# EAGLE board PDF_project_shield_final_version_v1 (EAGLE 8.7.0)
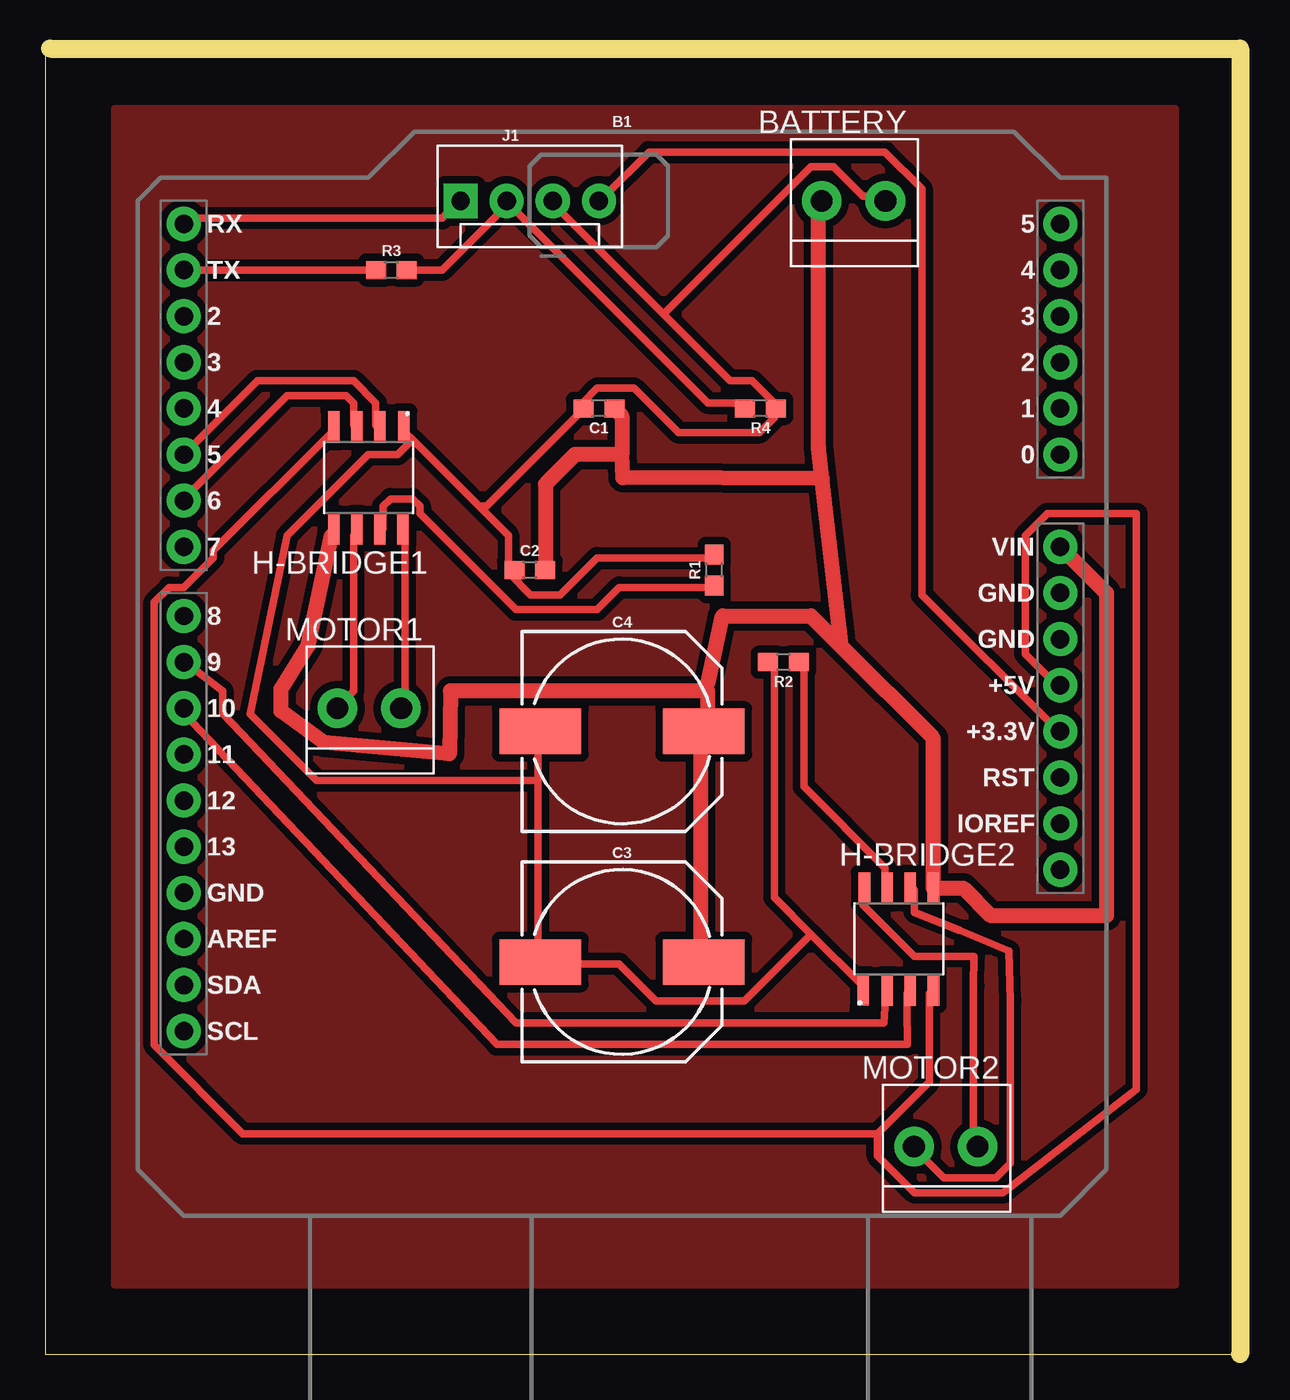
[diagram p0: board, top side]

Size 66.02 x 72.06 mm. Coordinates in mm from the lower left corner, seen from the top.
Outline: 0,0 66.02,0 66.02,72.06 0,72.06 0,0
Copper layers (1*16): Top 0.035mm / dielectric 1.5mm / Bottom 0.035mm
Design rules "default *": minimum track width 16mil, minimum drill 0.35mm, track to track 16mil, track to pad 16mil, pad to pad 16mil, via to via 16mil, smd to smd 16mil, copper to edge 40mil, drill to drill 6mil, minimum pad ring 10mil, minimum via ring 8mil, stop-mask expansion 4mil, vias tented up to drill 0mil, thermal gap 20mil
Milling: 2 lines

## Footprints (pad centres in the part's own frame; a part is rotated, then mirrored left to right if it is on the bottom)
UNO_R3_SHIELD = drill 1.016 pad 1.88: 3.3V 24.13,-2.54; 5V 24.13,0; A0 24.13,12.7; A1 24.13,15.24; A2 24.13,17.78; A3 24.13,20.32; A4 24.13,22.86; A5 24.13,25.4; AREF -24.13,-13.97; D2 -24.13,20.32; D3 -24.13,17.78; D4 -24.13,15.24; D5 -24.13,12.7; D6 -24.13,10.16; D7 -24.13,7.62; D8 -24.13,3.81; D9 -24.13,1.27; D10 -24.13,-1.27; D11 -24.13,-3.81; D12 -24.13,-6.35; D13 -24.13,-8.89; GND@0 24.13,2.54; GND@1 24.13,5.08; GND@2 -24.13,-11.43; IOREF 24.13,-7.62; NC 24.13,-10.16; RES 24.13,-5.08; RX -24.13,25.4; SCL -24.13,-19.05; SDA -24.13,-16.51; TX -24.13,22.86; VIN 24.13,7.62
ED555DS-2DS = drill 1.2 pad 2.184: 1 1.8,0; 2 -1.7,0
0603 = smd 1.1 x 1: 1 -0.85,0; 2 0.85,0
NIC_10X10.5_CAP = smd 4.5 x 2.5: + 4.5,0; - -4.5,0
H-BRIDGE_PACKAGE = smd 0.65 x 1.75: 1 -1.96,-2.79; 2 -0.64,-2.8; 3 0.63,-2.8; 4 1.9,-2.8; 5 1.9,2.8; 6 0.63,2.8; 7 -0.64,2.8; 8 -1.9,2.8
MOLEX-1X4 = drill 1.016 pad 1.88 square: 1 0,0 | drill 1.016 pad 1.88: 2 2.54,0; 3 5.08,0; 4 7.62,0

## Placement (x,y rotation side)
B1  ARDUINO_UNO_R3_SHIELDBASIC  [UNO_R3_SHIELD]  31.75,36.83 0 top
BATTERY  TERM-1X02-FABLAB  [ED555DS-2DS]  44.45,63.5 0 top
C1  0.22uF  [0603]  30.48,52.07 180 top
C2  0.22uF  [0603]  26.67,43.18 0 top
C3  100uF  [NIC_10X10.5_CAP]  31.75,21.59 0 top
C4  100uF  [NIC_10X10.5_CAP]  31.75,34.29 0 top
H-BRIDGE1  [H-BRIDGE_PACKAGE]  17.78,48.26 180 top
H-BRIDGE2  [H-BRIDGE_PACKAGE]  46.99,22.86 0 top
J1  [MOLEX-1X4]  22.86,63.5 0 top
MOTOR1  TERM-1X02-FABLAB  [ED555DS-2DS]  17.78,35.56 0 top
MOTOR2  TERM-1X02-FABLAB  [ED555DS-2DS]  49.53,11.43 0 top
R1  0.27  [0603]  36.83,43.18 90 top
R2  0.27  [0603]  40.64,38.1 180 top
R3  1k  [0603]  19.05,59.69 0 top
R4  2.0k  [0603]  39.37,52.07 180 top

## Library data of the parts
B1 = SparkFun-Boards
BATTERY MOTOR1 MOTOR2 = fab
C1 C2 = SparkFun-Capacitors; PROD_ID: CAP-07822
C3 C4 = SparkFun-Capacitors; PROD_ID: CAP-08362
H-BRIDGE1 H-BRIDGE2 = my_library
J1 = SparkFun-Connectors; PROD_ID: CONN-08186; SF_ID: PRT-08231
R1 R2 = SparkFun-Resistors; PROD_ID: RES-08787
R3 = SparkFun-Resistors; PROD_ID: RES-07856
R4 = SparkFun-Resistors; PROD_ID: RES-08296

## Nets
GND: BATTERY.1 C1.2 C2.1 C3.- C4.- H-BRIDGE1.1 H-BRIDGE2.1 J1.3 R1.2 R2.2 R4.1
N$1: B1.VIN BATTERY.2 C1.1 C2.2 C3.+ C4.+ H-BRIDGE1.5 H-BRIDGE2.5
N$2: B1.5V H-BRIDGE1.4 H-BRIDGE2.4
N$3: H-BRIDGE1.8 MOTOR1.1
N$4: H-BRIDGE1.6 MOTOR1.2
N$5: H-BRIDGE2.8 MOTOR2.1
N$6: H-BRIDGE2.6 MOTOR2.2
N$8: B1.D10 H-BRIDGE2.3
N$9: B1.D9 H-BRIDGE2.2
N$10: B1.D5 H-BRIDGE1.2
N$11: B1.D6 H-BRIDGE1.3
N$12: H-BRIDGE1.7 R1.1
N$13: H-BRIDGE2.7 R2.1
N$14: B1.TX R3.1
N$15: B1.RX J1.1
N$16: B1.3.3V J1.4
N$17: J1.2 R3.2 R4.2

## Tracks (layer width: path | path; a pad name or v marks a point on that pad's centre or on a via)
GND
  Top 0.406: 27.13,31.6 27.13,34.09 C4.- | 27.13,31.6 27.13,21.89 C3.- 27.53,21.49 31.6,21.49 33.63,19.46 38.51,19.46 42.16,23.11 | 42.16,23.11 45.01,20.27 H-BRIDGE2.1 | 42.16,23.11 40.13,25.15 40.13,37.74 R2.2 | 20.22,50.34 19.81,50.75 H-BRIDGE1.1 | 20.22,50.34 23.88,46.69 | 23.88,46.69 25.5,45.06 25.5,43.43 C2.1 25.5,43.03 26.72,41.81 28.35,41.81 30.38,43.84 36.47,43.84 R1.2 | 23.88,46.69 24.28,46.69 29.57,51.97 C1.2 29.57,52.38 30.38,53.19 32.41,53.19 34.85,50.75 39.32,50.75 40.13,51.56 40.13,51.97 R4.1 40.13,52.38 38.91,53.59 37.69,53.59 34.04,57.25 | 34.04,57.25 27.94,63.35 J1.3 | 34.04,57.25 42.16,65.38 43.38,65.38 45.01,63.75 46.23,63.75 BATTERY.1 | 27.13,31.6 14.94,31.6 11.28,35.25 13.31,45.06 17.78,49.53 19.41,49.53 20.22,50.34
N$1
  Top 0.406: 27.53,43.43 C2.2 | 36.47,36.53 36.47,36.93 | 36.47,34.49 C4.+ 36.07,34.09 | 15.75,45.06 H-BRIDGE1.5 | 42.57,63.35 BATTERY.2 | 36.07,21.89 C3.+ | 31.6,51.97 C1.1
  Top 0.813: 27.53,43.43 27.53,47.9 29.16,49.53 31.75,49.53 | 43.84,38.96 42.16,40.64 37.29,40.64 36.47,36.93 | 36.47,34.49 36.47,36.53 22.3,36.53 22.25,33.05 15.34,33.68 12.98,35.41 12.98,36.63 14.48,39.01 15.75,45.06 | 43.84,38.96 42.77,48.21 | 42.77,48.21 42.57,49.94 42.57,63.35 | 36.07,34.09 36.07,21.89 | B1.VIN 58.42,41.91 58.42,24.13 52.07,24.13 50.54,25.66 H-BRIDGE2.5 48.89,33.91 43.84,38.96 | C1.1 31.75,51.65 31.75,49.53 | 42.77,48.21 31.8,48.26 31.75,49.53
N$2
  Top 0.406: 45.82,12.14 48.67,14.99 48.67,19.86 H-BRIDGE2.4 | 45.82,12.14 45.82,10.92 47.85,8.89 52.73,8.89 60.07,14.58 60.07,46.28 55.17,46.28 53.95,45.06 53.95,38.56 55.58,36.93 B1.5V | 45.82,12.14 10.87,12.14 5.99,17.02 5.99,41.4 6.81,42.22 7.62,42.22 9.25,43.84 9.25,44.25 15.75,50.75 H-BRIDGE1.4
N$3
  Top 0.406: H-BRIDGE1.8 19.81,45.06 19.81,35.71 MOTOR1.1
N$4
  Top 0.406: H-BRIDGE1.6 16.97,45.06 16.97,36.53 16.15,35.71 MOTOR1.2
N$5
  Top 0.406: H-BRIDGE2.8 45.01,25.55 45.01,24.74 47.85,21.89 51.13,21.89 51.1,20.27 51.1,11.73 MOTOR2.1
N$6
  Top 0.406: H-BRIDGE2.6 47.85,25.55 47.85,24.33 50.37,23.34 53.06,22.2 53.14,19.46 53.14,10.52 52.32,9.7 49.48,9.7 47.85,11.33 MOTOR2.2
N$7
  pour Top: 3.81,68.58 62.23,68.58 62.23,3.81 3.81,3.81
N$8
  Top 0.406: H-BRIDGE2.3 47.45,19.86 47.45,19.05 47.47,17.04 24.87,17.04 7.62,35.31 B1.D10
N$9
  Top 0.406: H-BRIDGE2.2 46.23,19.86 46.23,19.05 46.18,18.24 25.91,18.24 9.75,35.28 9.75,36.53 7.62,38.15 B1.D9
N$10
  Top 0.406: B1.D5 11.68,53.59 16.97,53.59 18.19,52.38 18.19,51.16 H-BRIDGE1.2
N$11
  Top 0.406: H-BRIDGE1.3 16.97,51.16 16.97,52.38 16.56,52.78 13.31,52.78 7.62,47.09 B1.D6
N$12
  Top 0.406: R1.1 36.47,42.22 31.6,42.22 30.38,41 25.91,41 20.62,46.28 20.62,46.69 20.22,47.09 19,47.09 18.59,46.69 18.59,45.47 H-BRIDGE1.7
N$13
  Top 0.406: R2.1 41.76,37.74 41.76,31.24 46.23,26.77 46.23,25.96 H-BRIDGE2.7
N$14
  Top 0.406: B1.TX R3.1
N$15
  Top 0.406: B1.RX 7.62,62.53 21.84,62.53 22.66,63.35 J1.1
N$16
  Top 0.406: B1.3.3V 55.58,34.49 48.26,41.81 48.26,64.16 46.23,66.19 33.22,66.19 30.79,63.75 J1.4
N$17
  Top 0.406: R3.2 21.84,59.69 25.5,63.35 | 25.5,63.35 36.47,52.38 38.51,52.38 R4.2 | 25.5,63.35 J1.2